# Altium PCB PCB_wzmacniacz_PSEL.PcbDoc
Units mil, origin at the board's own origin, x right, y up, seen from the top; angles counter-clockwise.
Board outline 2755.91 x 1181.1 mil, 2 copper layers (Top Layer, Bottom Layer); 14 components, 9 nets, 48 pads, 9 vias.
Unrouted connection lines stored in the file: 4.
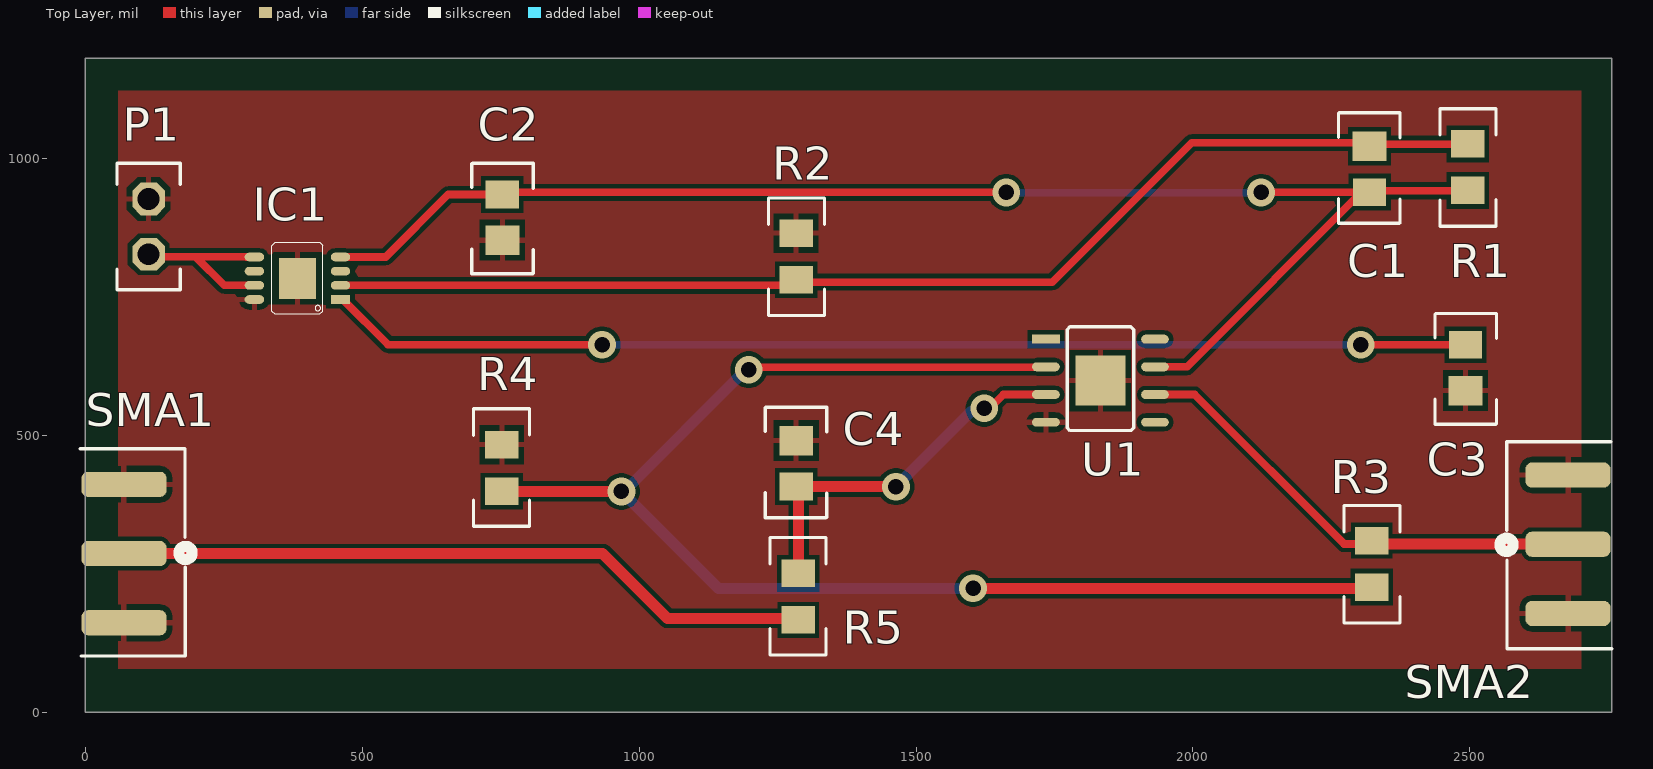
[diagram p0: Top Layer view]
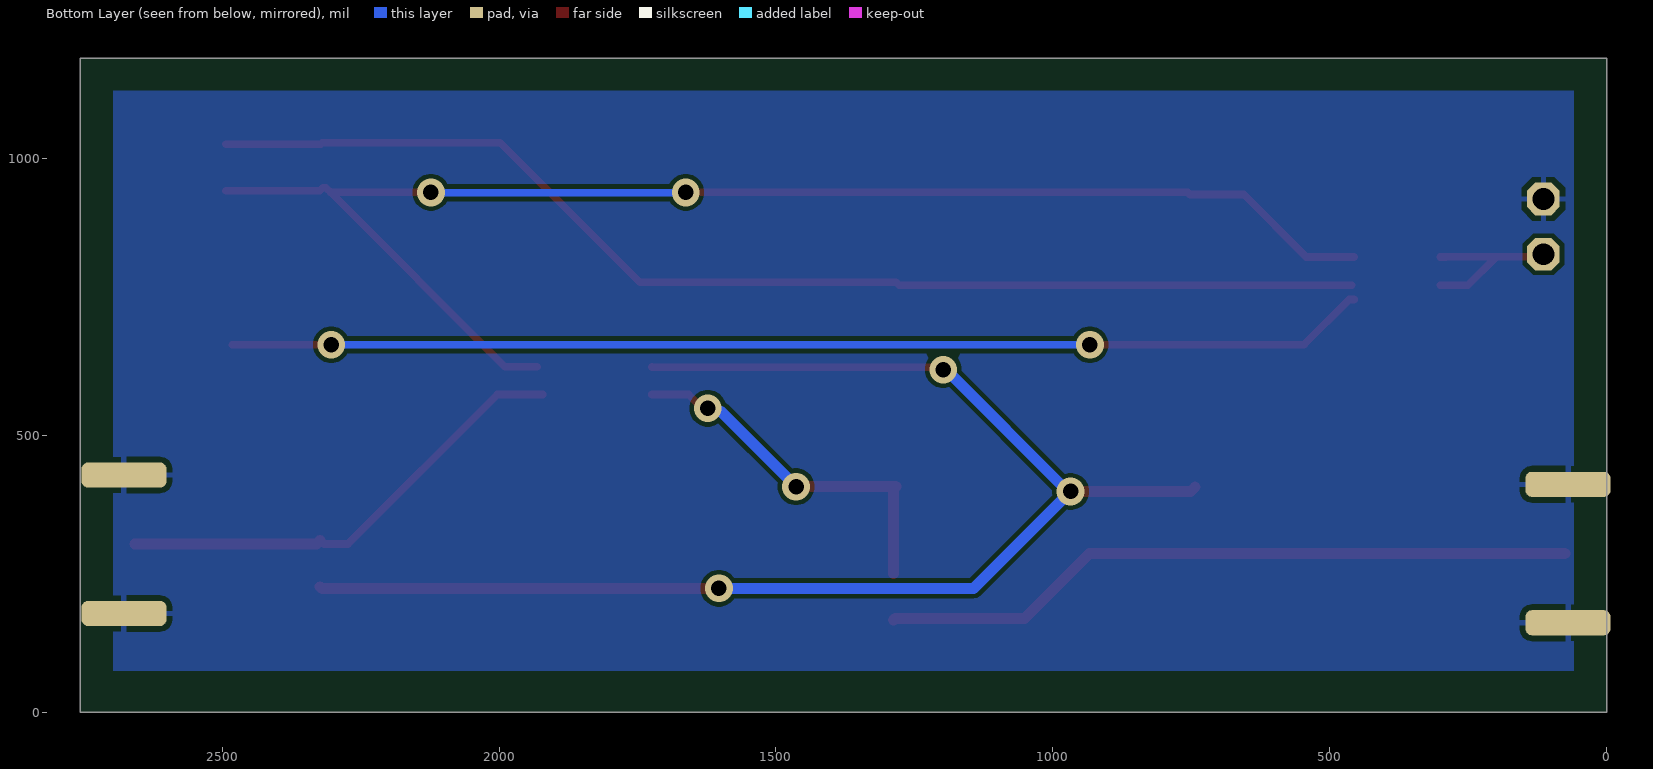
[diagram p1: Bottom Layer view, seen from below]

## Layer stack, top to bottom
Top Solder: solder mask 0.4, Solder Resist, Dk 3.5
Top Layer: signal copper 1.4
Dielectric 1: dielectric 12.6, FR-4, Dk 4.8
Bottom Layer: signal copper 1.4
Bottom Solder: solder mask 0.4, Solder Resist, Dk 3.5

## Board outline
2755.91,1181.1 0,1181.1 0,0 2755.91,0

## Design rules (kind name [scope] priority, off if disabled: settings)
Clearance [All] p1: gap=7.87 ignorepadtopadclearanceinfootprint=TRUE
HoleSize [All] p1: absolutevalues=TRUE maxlimit=100 minlimit=19.68 maxpercent=80.000 minpercent=20.000
MinimumAnnularRing [All] p1: minimumring=7.87
MinimumSolderMaskSliver [All] p1: minsoldermaskwidth=7.87
PolygonConnect [All] p1: connectstyle=Relief reliefconductorwidth=10 reliefentries=4 polygonreliefangle="90 Angle" airgapwidth=10
RoutingVias [All] p1: holewidth=28 width=50 viastyle="Through Hole" minholewidth=19.68 minwidth=35.43 maxholewidth=28 maxwidth=50
SolderMaskExpansion [All] p1: expansion=0.2 istentingtop=FALSE
SupplyNets "Schematic Supply Nets" [InNet('GND')] p1: voltage=0.000
Width [All] p1: maxlimit=118.11 minlimit=9.84 preferedwidth=11.81 minimp=50.000000 maximp=50.000000 favimp=50.000000
28 further rules are at their usual default settings.

## Components (designator, comment, footprint, x,y, rotation, side; value= is the part's Value field where it differs from the comment)
C1 "1.2u" C0805 2318.9,980.32 r270 top
C2 "10u" C0805 752.95,893.46 r90 top
C3 "1.2u" C0805 2492.13,622.05 r90 top
C4 "62p" C0805 1283.46,448.82 r270 top
IC1 "LT3063" "8-Lead Plastic MSOP" 382.95,783.46 r180 top
P1 "Header 2" Header-2 114.17,876.77 r90 top
R1 "16.5k" R0805 2496.06,984.25 r90 top
R2 "600" R0805 1283.46,822.83 r90 top
R3 "29.1k" R0805 2322.83,267.72 r90 top
R4 "1k" R0805 751.97,440.94 r270 top
R5 "10k" R0805 1287.4,208.66 r270 top
SMA1 "J01151A1201" "SMA socket" 69.8,286.42 r180 top
SMA2 "J01151A1201" "SMA socket" 2677.17,303.15 r0 top
U1 "ADA4625-1" SOIC_N_EP 1832.95,598.46 r0 top

## Footprints (in the part's own frame and the unit in brackets; to place one, negate y for a bottom-side part, rotate by r counter-clockwise, add the part's x,y. Pads: shape width x height; smd on the part's side, far side on the other; paste and mask are expansions set on the pad)
"8-Lead Plastic MSOP" [mm]
  rect 0.889x0.4 smd: 1(-1.975,0.975)
  oval 0.889x0.4 smd: 2(-1.975,0.325) 3(-1.975,-0.325) 4(-1.975,-0.975) 5(1.975,-0.975) 6(1.975,-0.325) 7(1.975,0.325) 8(1.975,0.975)
  rect 1.68x1.88 smd: 9(0,0)
  silkscreen extent -1.16,-1.64 1.17,1.64
C0805 [mm]
  rect 1.35x1.55 smd: 1(-1.05,0)
  rect 1.27x1.524 smd: 2(1.05,0)
  silkscreen extent -2.59,-1.42 2.48,1.4
Header-2 [mm]
  oct 1.5x1.5 hole 1: 1(-1.27,0) 2(1.27,0)
  silkscreen extent -2.9,-1.45 2.9,1.45
R0805 [mil]
  rect 50x60 smd: 1(-42,0) 2(42,0)
  silkscreen extent -107,-51 105,50
"SMA socket" [mm]
  rrect50% 3.9x1.15 smd: 1(0,0) 2(0,3.175) 4(0,-3.175)
  rrect50% 3.9x1.15 smd far side: 3(0,3.175) 5(0,-3.175)
  silkscreen extent -3.13,-4.8 2.02,4.7
SOIC_N_EP [mm]
  rect 1.27x0.41 smd: 1(-2.5,1.905)
  oval 1.27x0.41 smd: 2(-2.5,0.635) 3(-2.5,-0.635) 4(-2.5,-1.905) 5(2.5,-1.905) 6(2.5,-0.635) 7(2.5,0.635) 8(2.5,1.905)
  rect 2.29x2.29 smd: 9(0,0)
  silkscreen extent -1.52,-2.29 1.52,2.47

## Part data
C1 C3: library part Cap, Manufacterer=KEMET, Package=0805, Part number=C0805C125K4RACTU, Tolerance=10%, Footprint type=SMD, Pin count=2
C2: library part Cap, Manufacterer="KYOCERA AVX", Package=0805, Part number=0805X7R106KT1AT, Tolerance=10%, Footprint type=SMD, Pin count=2
C4: library part Cap, Manufacterer="KYOCERA AVX", Package=0805, Part number=600F620FT250XT, Tolerance=1%, Footprint type=SMD, Pin count=2
IC1: library part Linear_regulator, Manufacterer="Linear Technology", Package=SO-8, Footprint type=SMD, Model name=LT3063, Pin count=8
P1: "Header, 2-bin, vertical", Footprint type=THT, Pin count=2, Raster=1.54mm
R1: library part Res, Manufacterer=Panasonic, Package=0805, Part number=ERJ-P06F1652V, Tolerance=1%, Footprint type=SMD, Pin count=2
R2: library part Res, Manufacterer=Vishay, Package=0805, Part number=CRCW0805600RFKEAHP, Tolerance=1%, Footprint type=SMD, Pin count=2
R3: library part Res, Manufacterer=Vishay/Beischlag, Package=0805, Part number=RN73H2ATTD2912B25, Tolerance=0.1%, Footprint type=SMD, Pin count=2
R4: library part Res, Manufacterer=Vishay, Package=0805, Part number=MCU08050E1001BP100, Tolerance=0.1%, Footprint type=SMD, Pin count=2
R5: library part Res, Manufacterer=Vishay, Package=0805, Part number=MCU0805MD1002BP500, Tolerance=0.1%, Footprint type=SMD, Pin count=2
SMA1 SMA2: Manufacterer=Telegärtner, Footprint type=SMD, Impedance="50 ohm", Part number=J01151A1201, Pin count=5, Socket type=SMA
U1: library part "Wzmacniacz operacyjny", Manufacterer="Analog Devices", Package=SO-8, Footprint type=SMD, Model name=ADA4625-1, Pin count=8

## Via types
v1: diameter 50, hole 28, Top Layer to Bottom Layer, 9 vias

## Nets (pads, with @x,y where several pads share a name; then routed paths per layer and width w, separated by ;. In a path a pad name is that pad's centre, name@x,y a point inside that pad or via, vN(x,y) a via of type N, cw(c..) or ccw(c..) an arc to the next point about the centre after c; other vN are vias at no path point)
GND: C2.1 C3.1 C4.1 IC1.8 IC1.9 P1.2 R2.2 R4.1 SMA1.2 SMA1.3 SMA1.4 SMA1.5 SMA2.2 SMA2.3 SMA2.4 SMA2.5 U1.4 U1.9
NetC1_1: C1.1 IC1.2 R1.2 R2.1 | length 2140.3
  Top Layer w13.78: IC1.2 1277.16,770.67 1282.95,776.46 1745.95,776.46 1997.95,1028.46 2319.29,1028.46 2322.29,1025.46 R1.2@2492.95,1025.46
NetC1_2: C1.2 C2.2 IC1.4 R1.1 U1.7 | length 2595.4
  Top Layer w13.78: IC1.4@455.71,821.85 IC1.4 542.32,821.85 655.28,934.8 C2.2 756.61,938.46 v1(1662.95,938.46) ; U1.7 1989.29,623.46 C1.2@2304.29,938.46 ; v1(2122.95,938.46) C1.2@2304.29,938.46 ; R1.1@2492.95,941.46 2323.61,941.46 2317.95,947.13 2312.95,947.13 C1.2@2304.29,938.46
  Bottom Layer w13.78: v1(1662.95,938.46) 1663.56,937.85 2122.34,937.85 v1(2122.95,938.46)
NetC3_2: C3.2 IC1.1 | length 2059.7
  Top Layer w13.78: IC1.1@455.71,745.08 464.94,745.08 546.56,663.46 v1(932.95,663.46) ; v1(2302.95,663.46) C3.2@2481.61,663.46
  Bottom Layer w13.78: v1(932.95,663.46) v1(2302.95,663.46)
NetC4_2: C4.2 R5.1 U1.3 | length 669.2
  Top Layer w13.78: v1(1622.95,548.46) 1632.75,548.46 1657.75,573.46 U1.3@1724.53,573.46
  Top Layer w19.68: R5.1@1287.95,250.46 1287.95,402.13 1282.95,407.13 v1(1463.73,407.13)
  Bottom Layer w19.68: v1(1463.73,407.13) 1599.27,542.66 1617.15,542.66 v1(1622.95,548.46)
NetIC1_5: IC1.5 IC1.7 P1.1 | length 317.4
  Top Layer w13.78: P1.1 118.57,822.38 299.67,822.38 300.2,821.85 IC1.5@290.22,821.85 ; 201.31,820.08 250.72,770.67 IC1.7@300.2,770.67
NetR3_1: R3.1 R4.2 U1.2 | length 2506.8
  Top Layer w13.78: v1(1197.95,618.46) 1202.5,623.01 1724.08,623.01 U1.2@1724.53,623.46
  Top Layer w19.68: R4.2@742.95,406.46 750.95,398.46 v1(967.95,398.46) ; v1(1602.95,223.46) 2319.95,223.46 R3.1@2322.95,226.46
  Bottom Layer w19.68: v1(1197.95,618.46) 1192.95,618.46 972.95,398.46 v1(967.95,398.46) 1142.95,223.46 v1(1602.95,223.46)
NetR3_2: R3.2 SMA2.1 U1.6 | length 853.8
  Top Layer w13.78: U1.6@1921.38,573.46 2002.95,573.46 2272.76,303.66 2316.15,303.66 R3.2@2322.95,310.46
  Top Layer w19.68: R3.2@2322.95,310.46 2329.76,303.66 SMA2.1@2657.76,303.66
NetR5_2: R5.2 SMA1.1 | length 1262.8
  Top Layer w19.68: SMA1.1@74.8,286.42 934.06,286.42 1051.18,169.29 1285.13,169.29 R5.2@1287.95,166.46
pads on no net: IC1.3 IC1.6 U1.1 U1.5 U1.8

## Polygon pours and split planes (outlines as drawn)
GND on Bottom Layer "GND_L02_P001" (solid, pour order 1): 59.06,1122.05 2696.85,1122.05 2696.85,74.8 59.06,74.8
GND on Top Layer "GND_L01_P000" (solid, pour order 0): 59.06,1122.05 2700.79,1122.05 2700.79,78.74 59.06,78.74

## Silkscreen, mask and mechanical layers (free items; w line width, h text height)
Mechanical 1:
  lines w6: 0,1181.1 2755.91,1181.1 ; 0,1181.1 2755.91,1181.1 ; 0,1181.1 0,0 2755.91,0 2755.91,1181.1